# Altium PCB Cradle Controller.PcbDoc
Units mil, origin at the board's own origin, x right, y up, seen from the top; angles counter-clockwise.
Board outline 1722 x 1299 mil, 2 copper layers (Top Layer, Bottom Layer); 33 components, 29 nets, 145 pads, 17 vias.
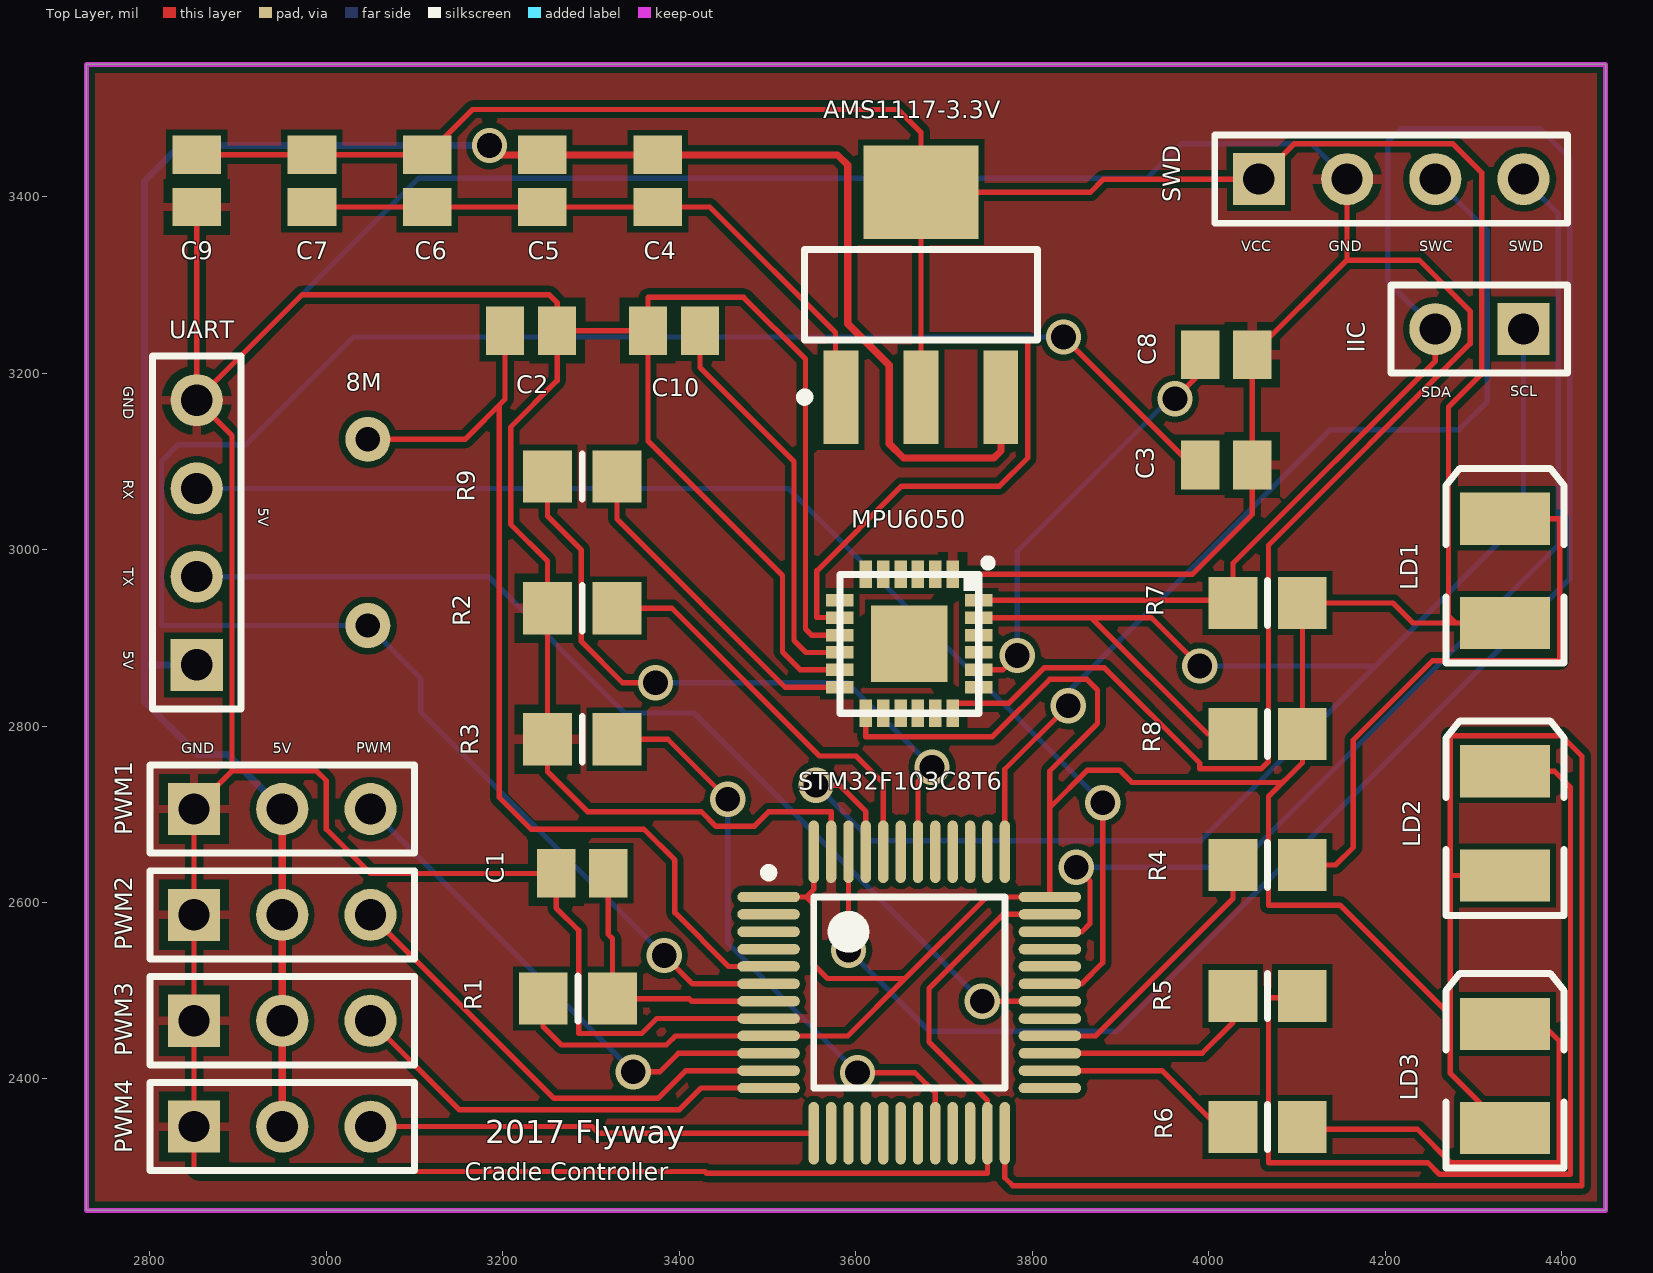
[diagram p0: Top Layer view]
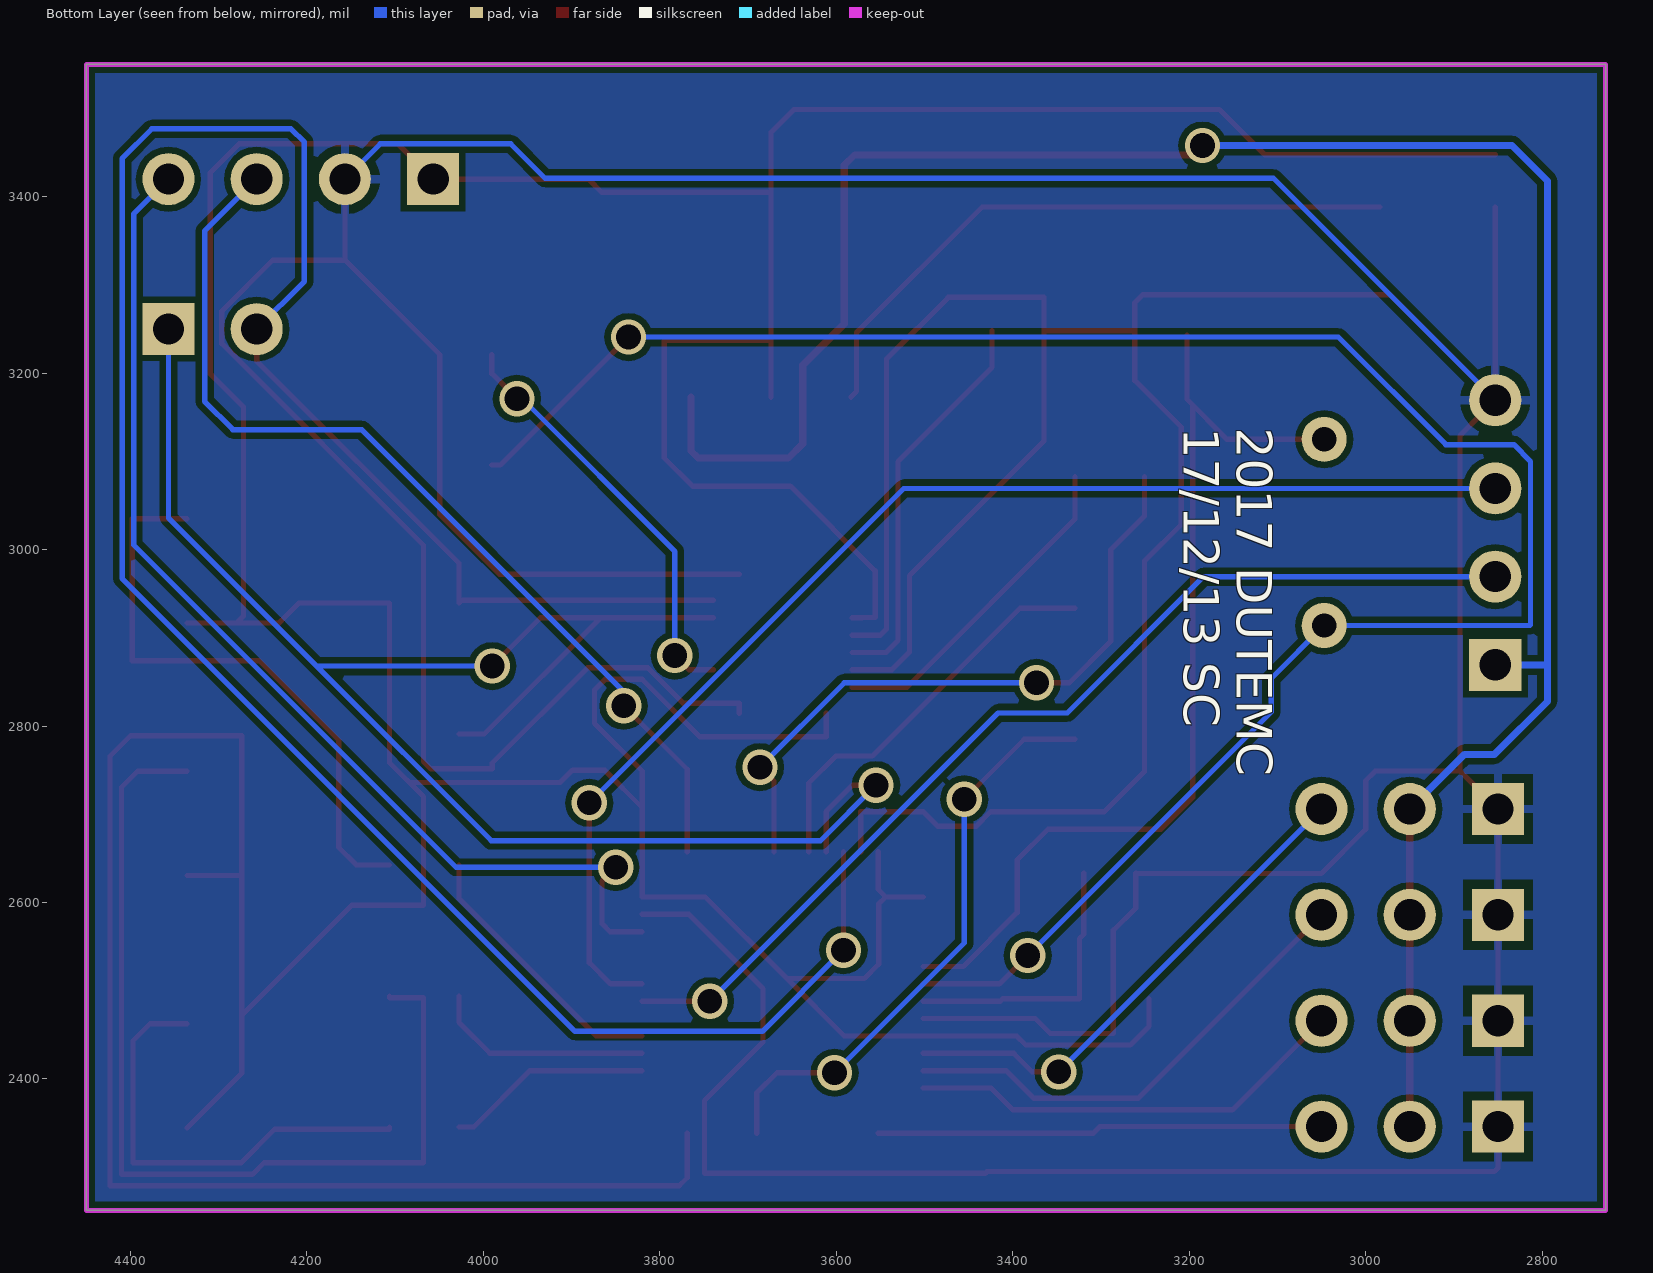
[diagram p1: Bottom Layer view, seen from below]

## Layer stack, top to bottom
Top Solder: solder mask 0.4, Solder Resist, Dk 3.5
Top Layer: signal copper 1.4
Dielectric 1: dielectric 12.6, FR-4, Dk 4.8
Bottom Layer: signal copper 1.4
Bottom Solder: solder mask 0.4, Solder Resist, Dk 3.5

## Board outline
4450,2251 2728,2251 2728,3550 4450,3550

## Design rules (kind name [scope] priority, off if disabled: settings)
Clearance [All] p1: gap=7
PolygonConnect [All] p1: connectstyle=Relief reliefconductorwidth=10 reliefentries=4 polygonreliefangle="90 Angle" airgapwidth=10
RoomDefinition "Cradle Controller" [InComponentClass('Cradle Controller')] p1: confinementstyle=ConfineIn formatcopy=TRUE lockcomponents=FALSE outline 2728,2251 4450,2251 4450,3550 2728,3550
RoutingPriority RoutingPriority_1 [InNetClass('VCCGND')] p1: routingpriority=1
RoutingPriority [All] p2: routingpriority=2
RoutingTopology RoutingTopology_1 [InNetClass('VCCGND')] p2: topology=Horizontal
RoutingVias [All] p1: holewidth=28 width=40 viastyle="Through Hole" minholewidth=28 minwidth=40 maxholewidth=28 maxwidth=40
SolderMaskExpansion [All] p1: expansion=4
Width [All] p1: maxlimit=8 minlimit=6 preferedwidth=6 minimp=50.000000 maximp=50.000000 favimp=50.000000
Width Width_1 [InNetClass('VCCGND')] p2: maxlimit=10 minlimit=8 preferedwidth=8 minimp=50.000000 maximp=50.000000 favimp=50.000000
29 further rules are at their usual default settings.

## Components (designator, comment, footprint, x,y, rotation, side; value= is the part's Value field where it differs from the comment)
8M "8M" SOP10 3367,3354 r270 top
AMS1117-3.3V "AMS1117-3.3V" SOT223_M 3674,3289 r90 top
C1 "104" C0805 3290,2633.06 r0 top
C2 "22PF" C0805 3232,3248 r180 top
C3 "20PF" C0805 4020,3096 r180 top
C4 "104" C0805 3375.53,3418 r270 top
C5 "106" C0805 3244.9,3418 r270 top
C6 "106" C0805 3114.26,3418 r270 top
C7 "104" C0805 2983.63,3418 r270 top
C8 "2.2NF" C0805 4020,3221 r0 top
C9 "104" C0805 2853,3418 r90 top
C10 "104" C0805 3394,3248 r0 top
IIC "Header 2" HDR1X2 4357,3250 r180 top
LD1 "1 红色" 3.5X2.8X1.9 4336,2976 r90 top
LD2 "2 黄色" 3.5X2.8X1.9 4336,2689.73 r90 top
LD3 "3 绿色" 3.5X2.8X1.9 4336,2403.47 r90 top
MPU6050 "MPU6050" MPU6050 3582,2972 r270 top
PWM1 "Header 3" HDR1X3 2850,2706 r0 top
PWM2 "Header 3" HDR1X3 2850,2586 r0 top
PWM3 "Header 3" HDR1X3 2850,2466 r0 top
PWM4 "Header 3" HDR1X3 2850,2346 r0 top
R1 "10K" 6-0805_M 3285,2491 r0 top
R2 "10K" 6-0805_M 3290,2933.56 r0 top
R3 "10K" 6-0805_M 3290,2785.06 r180 top
R4 "560" 6-0805_M 4067,2642.5 r0 top
R5 "560" 6-0805_M 4067,2494 r0 top
R6 "560" 6-0805_M 4067,2345.5 r0 top
R7 "10K" 6-0805_M 4067,2939.5 r0 top
R8 "10K" 6-0805_M 4067,2791 r0 top
R9 "1K" 6-0805_M 3290,3083 r0 top
STM32F103C8T6 "STM32F103C8T6" LQFP48_N 3660.74,2498 r0 top
SWD "Header 4" HDR1X4 4057,3420 r0 top (schematic designator JLINK)
UART "Header 4" HDR1X4 2853,2869.42 r90 top

## Footprints (in the part's own frame and the unit in brackets; to place one, negate y for a bottom-side part, rotate by r counter-clockwise, add the part's x,y. Pads: shape width x height; smd on the part's side, far side on the other; paste and mask are expansions set on the pad)
3.5X2.8X1.9 [mm] "SM LED; 2 C-Bend Leads; Body 3.5 x 2.8 x 1.9 mm, inc leads (LxWxH typ)"
  rect 1.5x2.6 smd: 1(-1.5,0) 2(1.5,0)
  silkscreen extent -2.65,-1.7 2.95,1.7
6-0805_M [mm] "Chip Resistor, Body 2.0x1.2mm, IPC Low Density"
  rect 1.4x1.5 smd: 1(-1,0) 2(1,0)
  silkscreen extent 0,-0.65 0,0.65, body extent -1.07,-0.7 1.07,0.7, height 0.7
C0805 [mm] "Chip Capacitor, Body 2.0x1.3mm, IPC High Density"
  rect 1.1x1.4 smd: 1(-0.75,0) 2(0.75,0)
  body extent -1.1,-0.72 1.1,0.72, height 1.4
HDR1X2 [mm] "Connector; Header; 2 Position"
  rect 1.5x1.5 hole 0.9: 1(0,0)
  round 1.5 hole 0.9: 2(2.54,0)
  silkscreen extent -1.27,-1.27 3.81,1.27
HDR1X3 [mm] "Connector; Header; 3 Position"
  rect 1.5x1.5 hole 0.9: 1(0,0)
  round 1.5 hole 0.9: 2(2.54,0) 3(5.08,0)
  silkscreen extent -1.27,-1.27 6.35,1.27
HDR1X4 [mm] "Connector; Header; 4 Position"
  rect 1.5x1.5 hole 0.9: 1(0,0)
  round 1.5 hole 0.9: 2(2.54,0) 3(5.08,0) 4(7.62,0)
  silkscreen extent -1.27,-1.27 8.89,1.27
LQFP48_N [mm] "Thin QFP, 48-Leads, Body 7x7mm, Pitch 0.5mm, IPC Medium Density"
  oval 1.8x0.3 smd: 1(-4.05,2.75) 2(-4.05,2.25) 3(-4.05,1.75) 4(-4.05,1.25) 5(-4.05,0.75) 6(-4.05,0.25) 7(-4.05,-0.25) 8(-4.05,-0.75) 9(-4.05,-1.25) 10(-4.05,-1.75) 11(-4.05,-2.25) 12(-4.05,-2.75) 25(4.05,-2.75) 26(4.05,-2.25) 27(4.05,-1.75) 28(4.05,-1.25) 29(4.05,-0.75) 30(4.05,-0.25) 31(4.05,0.25) 32(4.05,0.75) 33(4.05,1.25) 34(4.05,1.75) 35(4.05,2.25) 36(4.05,2.75)
  oval 0.3x1.8 smd: 13(-2.75,-4.05) 14(-2.25,-4.05) 15(-1.75,-4.05) 16(-1.25,-4.05) 17(-0.75,-4.05) 18(-0.25,-4.05) 19(0.25,-4.05) 20(0.75,-4.05) 21(1.25,-4.05) 22(1.75,-4.05) 23(2.25,-4.05) 24(2.75,-4.05) 37(2.75,4.05) 38(2.25,4.05) 39(1.75,4.05) 40(1.25,4.05) 41(0.75,4.05) 42(0.25,4.05) 43(-0.25,4.05) 44(-0.75,4.05) 45(-1.25,4.05) 46(-1.75,4.05) 47(-2.25,4.05) 48(-2.75,4.05)
  silkscreen extent -4.17,-2.75 2.75,3.57, body extent -3.5,-3.5 3.5,3.5, height 1.6
MPU6050 [mm]
  rect 0.8x0.36 smd: 1(0,3.25) 2(0,2.75) 3(0,2.25) 4(0,1.75) 5(0,1.25) 6(0,0.75) 13(4,0.75) 14(4,1.25) 15(4,1.75) 16(4,2.25) 17(4,2.75) 18(4,3.25)
  rect 0.36x0.8 smd: 7(0.75,0) 8(1.25,0) 9(1.75,0) 10(2.25,0) 11(2.75,0) 12(3.25,0) 19(3.25,4) 20(2.75,4) 21(2.25,4) 22(1.75,4) 23(1.25,4) 24(0.75,4)
  rect 2.2x2.2 smd: 25(2,2)
  silkscreen extent -0.42,0 4,4.36
SOP10 [mm]
  round 1.3 hole 0.7: 1(5.816,-8.128) 2(11.176,-8.128)
SOT223_M [mm] "SOT223, 4-Leads, Body 6.5x3.5mm, Pitch 2.3mm, Lead Span 7mm, IPC Low Density"
  rect 2.7x1 smd: 1(-2.95,2.3) 2(-2.95,0) 3(-2.95,-2.3)
  rect 2.7x3.3 smd: 4(2.95,0)
  silkscreen extent -3.07,-3.35 1.3,3.47, body extent -1.85,-3.35 1.85,3.35, height 1.7

## Part data
8M: library part XTAL, "Crystal Oscillator"
AMS1117-3.3V: library part 1117-3.3V
C1 C2 C3 C8 C9 C10: library part Cap, "Capacitor"
C4 C5 C6 C7: library part "Cap Semi", "Capacitor (Semiconductor SIM Model)"
IIC: "Header, 2-Pin"
LD1 LD2 LD3: library part LED3, "Typical BLUE SiC LED"
PWM1 PWM2 PWM3 PWM4: "Header, 3-Pin"
R1 R2 R3 R4 R5 R6 R7 R8 R9: library part Res2, "Resistor"
STM32F103C8T6: "STM32 ARM-based 32-bit MCU with 64 Kbytes Flash, 48-pin LQFP, Industrial Temperature"
SWD UART: "Header, 4-Pin"

## Via types
v1: diameter 40, hole 28, Top Layer to Bottom Layer, 17 vias

## Nets (pads, with @x,y where several pads share a name; then routed paths per layer and width w, separated by ;. In a path a pad name is that pad's centre, name@x,y a point inside that pad or via, vN(x,y) a via of type N, cw(c..) or ccw(c..) an arc to the next point about the centre after c; other vN are vias at no path point)
5V: AMS1117-3.3V.3 C4.1 C5.1 PWM1.2 PWM2.2 PWM3.2 PWM4.2 UART.1 | length 2570.5
  Top Layer w8: PWM4.2 PWM3.2 PWM2.2 PWM1.2 ; v1(3185,3458) 3195.47,3447.53 C5.1 C4.1 3579.47,3447.53 3591,3436 3591,3256 3638,3209 3638,3120 3654,3104 3756.55,3104 3764.55,3112 AMS1117-3.3V.3
  Bottom Layer w8: 2794.58,2869.42 UART.1 ; PWM1.2 2888,2768 2854,2768 2794,2828 2794,3418 2834,3458 v1(3185,3458)
GND: C1.1 C2.1 C3.1 C8.2 C9.1 C10.1 MPU6050.1 MPU6050.9 MPU6050.11 MPU6050.18 PWM1.1 PWM2.1 PWM3.1 PWM4.1 R2.1 R3.2 STM32F103C8T6.8 STM32F103C8T6.23 STM32F103C8T6.35 STM32F103C8T6.47 SWD.2 UART.4 | length 9360.2
  Top Layer w6: C9.1 UART.4 ; C1.1 C1.1@3260.47,2633 ; STM32F103C8T6.8 3374.47,2468.47 3357.47,2451.47 3286,2451.47 3286,2568.47 3260.47,2594 C1.1@3260.47,2633 ; STM32F103C8T6.47 3572.16,2703 3501.58,2703 3484.91,2686.34 3441.58,2686.34 3424.91,2703 3296,2703 3250.63,2748.37 R3.2 R2.1 3250.63,2987 3209,3028.63 3209,3139 3261.53,3191.53 C2.1 ; MPU6050.11 3537.21,2863.73 3517,2883.94 3517,2970.47 3364.47,3123 C10.1 ; MPU6050.9 3549.84,2903.1 3543,2909.94 3543,3216 3473,3286 3364.47,3286 C10.1 ; MPU6050.18 3709.95,2826 3773.61,2826 3813.61,2866 3882,2866 3990,2758 3990,2751.47 4059.47,2751.47 4068,2760 4068,3005 4296.53,3233.53 4296.53,3270.47 4239,3328 4157.47,3328 4157,3328.47 C8.2 C3.1 4049.53,3040 3981.53,2972 MPU6050.1 ; STM32F103C8T6.35 3767,2586.58 3683,2502.58 3683,2442 3749.32,2375.68 STM32F103C8T6.23 3749.32,2293 3431,2293 3429,2295 2854,2295 2850,2299 PWM4.1 PWM3.1 PWM2.1 PWM1.1 2893,2749 ; 4157,3328 SWD.2@4157,3411 ; UART.4 2972.58,3289 3252.53,3289 3261.53,3280 C2.1 ; UART.4 2893,3129.42 2893,2749 ; 2893,2749 2989,2749 3000,2738 3000,2683 3050,2633 C1.1@3260.47,2633 ; C2.1 C10.1
  Bottom Layer w6: UART.4 3104.58,3421 3930,3421 3969,3460 4117,3460 SWD.2
INT: R9.1 STM32F103C8T6.42 | length 762.1
  Top Layer w6: R9.1 3250.63,3038 3289,2999.63 3289,2896 3336,2849 v1(3373,2849) ; STM32F103C8T6.42 3670.58,2737.42 v1(3686.58,2753.42)
  Bottom Layer w6: v1(3373,2849) 3591,2849 v1(3686.58,2753.42)
L1: R4.1 STM32F103C8T6.28 | length 310
  Top Layer w6: STM32F103C8T6.28 3872,2448.79 4027.63,2604.42 R4.1
L2: R5.1 STM32F103C8T6.27 | length 251.9
  Top Layer w6: STM32F103C8T6.27 3992.73,2429.1 4027.63,2464 R5.1
L3: R6.1 STM32F103C8T6.26 | length 233.9
  Top Layer w6: STM32F103C8T6.26 3947.08,2409.42 4011,2345.5 R6.1
Net8M_1: 8M.1 C2.2 STM32F103C8T6.5 | length 1110.7
  Top Layer w6: 8M.1 3157.02,3125.02 3202.47,3170.47 ; 3196,3164 3196,2719 3232,2683 3360,2683 3395,2648 3395,2588.53 3456,2527.53 STM32F103C8T6.5 ; 3202.47,3171 C2.2@3202.47,3243
Net8M_2: 8M.2 C3.2 STM32F103C8T6.6 | length 2360.1
  Top Layer w6: v1(3383,2540) 3415.16,2507.84 STM32F103C8T6.6 ; v1(3835.53,3241) 3980.53,3096 C3.2
  Bottom Layer w6: v1(3383,2540) 3107,2816 3107,2854 8M.2 2814,2914 2813,2915 2813,3100 2832,3119 2909,3119 3031,3241 v1(3835.53,3241)
NetAMS1117-3.3V_1: AMS1117-3.3V.1 C4.2 C5.2 C6.2 C7.2 | length 728.2
  Top Layer w6: C7.2 C6.2 C5.2 C4.2 3434.53,3388.47 3577,3246 3577,3179.31 AMS1117-3.3V.1
NetC1_2: C1.2 R1.2 STM32F103C8T6.7 | length 322.2
  Top Layer w6: C1.2 3319.53,2563.84 3324.37,2559 R1.2 3411,2491 3413.84,2488.16 STM32F103C8T6.7
NetC8_1: C8.1 MPU6050.20 | length 480.7
  Top Layer w6: MPU6050.20 3766.73,2863.73 v1(3783,2880) ; v1(3962,3171) 3990.47,3199.47 C8.1
  Bottom Layer w6: v1(3783,2880) 3783,2998 3956,3171 v1(3962,3171)
NetC10_2: C10.2 MPU6050.10 | length 452.8
  Top Layer w6: C10.2 3423.53,3206.47 3530,3100 3530,2896.94 3543.53,2883.42 MPU6050.10
NetLD1_2: LD1.2 R4.2 | length 681.7
  Top Layer w6: R4.2 4144,2642.5 4164,2662.5 4164,2784 4254,2874 4398,2874 4398,3035.05 LD1.2
NetLD2_2: LD2.2 R5.2 | length 1095.4
  Top Layer w6: R5.2 4106.37,2492 4068,2492 4068,2305 4248.7,2305 4261.82,2291.88 4410.18,2291.88 4410.18,2730.61 4392,2748.79 LD2.2
NetLD3_2: LD3.2 R6.2 | length 516.7
  Top Layer w6: R6.2 4106.37,2343 4236.7,2343 4274.82,2304.88 4397.18,2304.88 4397.18,2443.34 4378,2462.52 LD3.2
NetMPU6050_12: MPU6050.12 R9.2 | length 379.9
  Top Layer w6: R9.2 3329.37,3034.63 3519.95,2844.05 MPU6050.12
NetR2_2: R2.2 STM32F103C8T6.44 | length 461.9
  Top Layer w6: R2.2 3391.66,2933.56 3559.04,2766.17 3600.54,2766.17 3631.21,2735.5 STM32F103C8T6.44
NetR3_1: R3.1 STM32F103C8T6.20 | length 668
  Top Layer w6: R3.1 3386.94,2785.06 v1(3455,2717) ; v1(3602,2407) 3667.27,2407 3690.27,2384 STM32F103C8T6.20
  Bottom Layer w6: v1(3455,2717) 3455,2554 v1(3602,2407)
PWM1: PWM1.3 STM32F103C8T6.10 | length 583.5
  Top Layer w6: v1(3348,2408) 3377.9,2408 3399,2429.1 STM32F103C8T6.10
  Bottom Layer w6: PWM1.3 v1(3348,2408)
PWM2: PWM2.3 STM32F103C8T6.11 | length 550.5
  Top Layer w6: PWM2.3 3258,2378 3376,2378 3407.42,2409.42 STM32F103C8T6.11
PWM3: PWM3.3 STM32F103C8T6.12 | length 503.4
  Top Layer w6: PWM3.3 3151,2365 3399.86,2365 3424.59,2389.73 STM32F103C8T6.12
PWM4: PWM4.3 STM32F103C8T6.13 | length 505.6
  Top Layer w6: PWM4.3 3301,2346 3308.45,2338.55 STM32F103C8T6.13
RX: STM32F103C8T6.31 UART.3 | length 1425.5
  Top Layer w6: STM32F103C8T6.31 3856,2507.84 3880,2531.84 v1(3880,2713)
  Bottom Layer w6: UART.3 3523.58,3069.42 v1(3880,2713)
SCL: IIC.1 MPU6050.23 R8.1 STM32F103C8T6.45 | length 1995
  Top Layer w6: v1(3555,2733) 3581.53,2733 3611.53,2703 STM32F103C8T6.45 ; MPU6050.23 3935.21,2922.79 v1(3990,2868) ; 3867.5,2922.5 3999,2791 R8.1
  Bottom Layer w6: v1(3555,2733) 3618,2670 3991,2670 4189,2868 ; v1(3990,2868) 4189,2868 ; IIC.1 4357,3036 4189,2868
SDA: IIC.2 MPU6050.24 R7.1 STM32F103C8T6.46 | length 2811.8
  Top Layer w6: v1(3591.84,2546) STM32F103C8T6.46 ; MPU6050.24 4024.66,2942.47 R7.1 4027.63,2984.63 4257,3214 IIC.2
  Bottom Layer w6: v1(3591.84,2546) 3683.84,2454 3896.04,2454 4409.53,2967.49 4409.53,3443.47 4376,3477 4218,3477 4203,3462 4203,3304 IIC.2
SWCLK: STM32F103C8T6.37 SWD.3 | length 1099.1
  Top Layer w6: STM32F103C8T6.37 3769.01,2751.01 v1(3841,2823)
  Bottom Layer w6: v1(3841,2823) 3841,2839 4138,3136 4284,3136 4316,3168 4316,3361 SWD.3
SWDIO: STM32F103C8T6.34 SWD.4 | length 1248.5
  Top Layer w6: STM32F103C8T6.34 3856.52,2566.9 3865.62,2576 3865.62,2624.38 v1(3850,2640)
  Bottom Layer w6: v1(3850,2640) 4031,2640 4396.53,3005.53 4396.53,3380.47 SWD.4
TX: STM32F103C8T6.30 UART.2 | length 1166.5
  Top Layer w6: v1(3743.37,2488.16) STM32F103C8T6.30
  Bottom Layer w6: UART.2 3183.76,2969.42 3338.24,2814.94 3416.59,2814.94 v1(3743.37,2488.16)
VCC: AMS1117-3.3V.2 AMS1117-3.3V.4 C6.1 C7.1 C9.2 LD1.1 LD2.1 LD3.1 MPU6050.8 MPU6050.13 R1.1 R7.2 R8.2 STM32F103C8T6.1 STM32F103C8T6.9 STM32F103C8T6.24 STM32F103C8T6.36 STM32F103C8T6.48 SWD.1 | length 7556.6
  Top Layer w6: C9.2 C7.1 C6.1 3165.74,3499 3648,3499 3674,3473 AMS1117-3.3V.4 ; R1.1 3245.63,2459.37 3266.53,2438.47 3385.25,2438.47 3395.56,2448.79 STM32F103C8T6.9 3591.02,2448.79 3656.04,2513.8 ; STM32F103C8T6.1 3544,2606.27 ; STM32F103C8T6.48 3552.47,2614.74 3544,2606.27 ; MPU6050.8 3571,2922.79 3571,2923 3556,2923 3556,2976 3652,3072 3763,3072 3795,3104 3795,3237 3674,3237 ; MPU6050.13 3611.53,2788 3755,2788 3820,2853 3862,2853 3874,2841 3874,2803 3820,2749 3820,2707.38 ; AMS1117-3.3V.2 3674,3237 ; STM32F103C8T6.24 3769.01,2288 3778.13,2278.88 4423.18,2278.88 4423.18,2765.82 4400,2789 4274,2789 4274,2406.15 ; STM32F103C8T6.36 STM32F103C8T6.36@3820,2606.27 ; 4084,2736 3913,2736 3899,2750 3862.62,2750 3820,2707.38 ; 4273.5,2472.5 4149,2597 4068,2597 4068,2720 4106.37,2758.37 R8.2 R7.2 4209,2939.5 4231.56,2916.94 4280,2916.94 ; 4274.26,2406.15 LD3.1 ; 4275.32,2630.68 LD2.1 ; LD1.1 4280,2916.94 ; 3544,2606.27 3552,2598.27 3552,2530 3568.2,2513.8 3656.04,2513.8 ; 3656.04,2513.8 3748.5,2606.27 STM32F103C8T6.36@3820,2606.27 ; 3674,3237 AMS1117-3.3V.4 ; AMS1117-3.3V.4 3866,3405.14 3880.86,3420 SWD.1 4097,3460 4277,3460 4309.53,3427.47 4309.53,3199.09 4272,3161.56 4272,2924.94 4280,2916.94 ; STM32F103C8T6.36@3820,2606.27 3820,2707.38
pads on no net: MPU6050.2 MPU6050.3 MPU6050.4 MPU6050.5 MPU6050.6 MPU6050.7 MPU6050.14 MPU6050.15 MPU6050.16 MPU6050.17 MPU6050.19 MPU6050.21 MPU6050.22 MPU6050.25 STM32F103C8T6.2 STM32F103C8T6.3 STM32F103C8T6.4 STM32F103C8T6.14 STM32F103C8T6.15 STM32F103C8T6.16 STM32F103C8T6.17 STM32F103C8T6.18 STM32F103C8T6.19 STM32F103C8T6.21 STM32F103C8T6.22 STM32F103C8T6.25 STM32F103C8T6.29 STM32F103C8T6.32 STM32F103C8T6.33 STM32F103C8T6.38 STM32F103C8T6.39 STM32F103C8T6.40 STM32F103C8T6.41 STM32F103C8T6.43

## Polygon pours and split planes (outlines as drawn)
GND on Bottom Layer "Top Layer-No Net" (solid, pour order 12): 2728,3550 2728,2251 4450,2251 4450,3550
GND on Top Layer "Top Layer-No Net" (solid, pour order 14): 2728,2251 4450,2251 4450,3550 2728,3550

## Keep-outs
Keep-Out Layer:
  the board outline again, w6

## Silkscreen, mask and mechanical layers (free items; w line width, h text height)
Top Overlay:
  text "VCC" at 4037,3338 h12
  text "GND" at 4136,3338 h12
  text "SWC" at 4239,3338 h12
  text "SWD" at 4340,3338 h12
  text "GND" at 2770,3185.42 h12 r270
  text "SCL" at 4342,3174 h12
  text "SDA" at 4241,3173 h12
  text "RX" at 2770,3079.42 h12 r270
  text "5V" at 2923,3047.42 h12 r270
  text "TX" at 2770,2979.42 h12 r270
  text "5V" at 2770,2885.42 h12 r270
  text "PWM" at 3033.58,2770 h12
  text "GND" at 2835.58,2769 h12
  text "5V" at 2939,2769 h12
  text "2017 Flyway" at 3180,2327 h26
  text "Cradle Controller" at 3157,2285 h20
Bottom Overlay:
  text "2017 DUTEMC / 17/12/13 SC" at 3206,3138 h40 r90